# Altium PCB pcb.PcbDoc (part 9 of 9)
Units mil, origin at the board's own origin, x right, y up, seen from the top; angles counter-clockwise.
Board outline 3937.01 x 3937.01 mil, 4 copper layers (Top Layer, Ground plane, Power plane, Bottom Layer), stack 51.4 mil thick; 310 components, 276 nets, 1704 pads, 977 vias.
Unrouted connection lines stored in the file: 44.
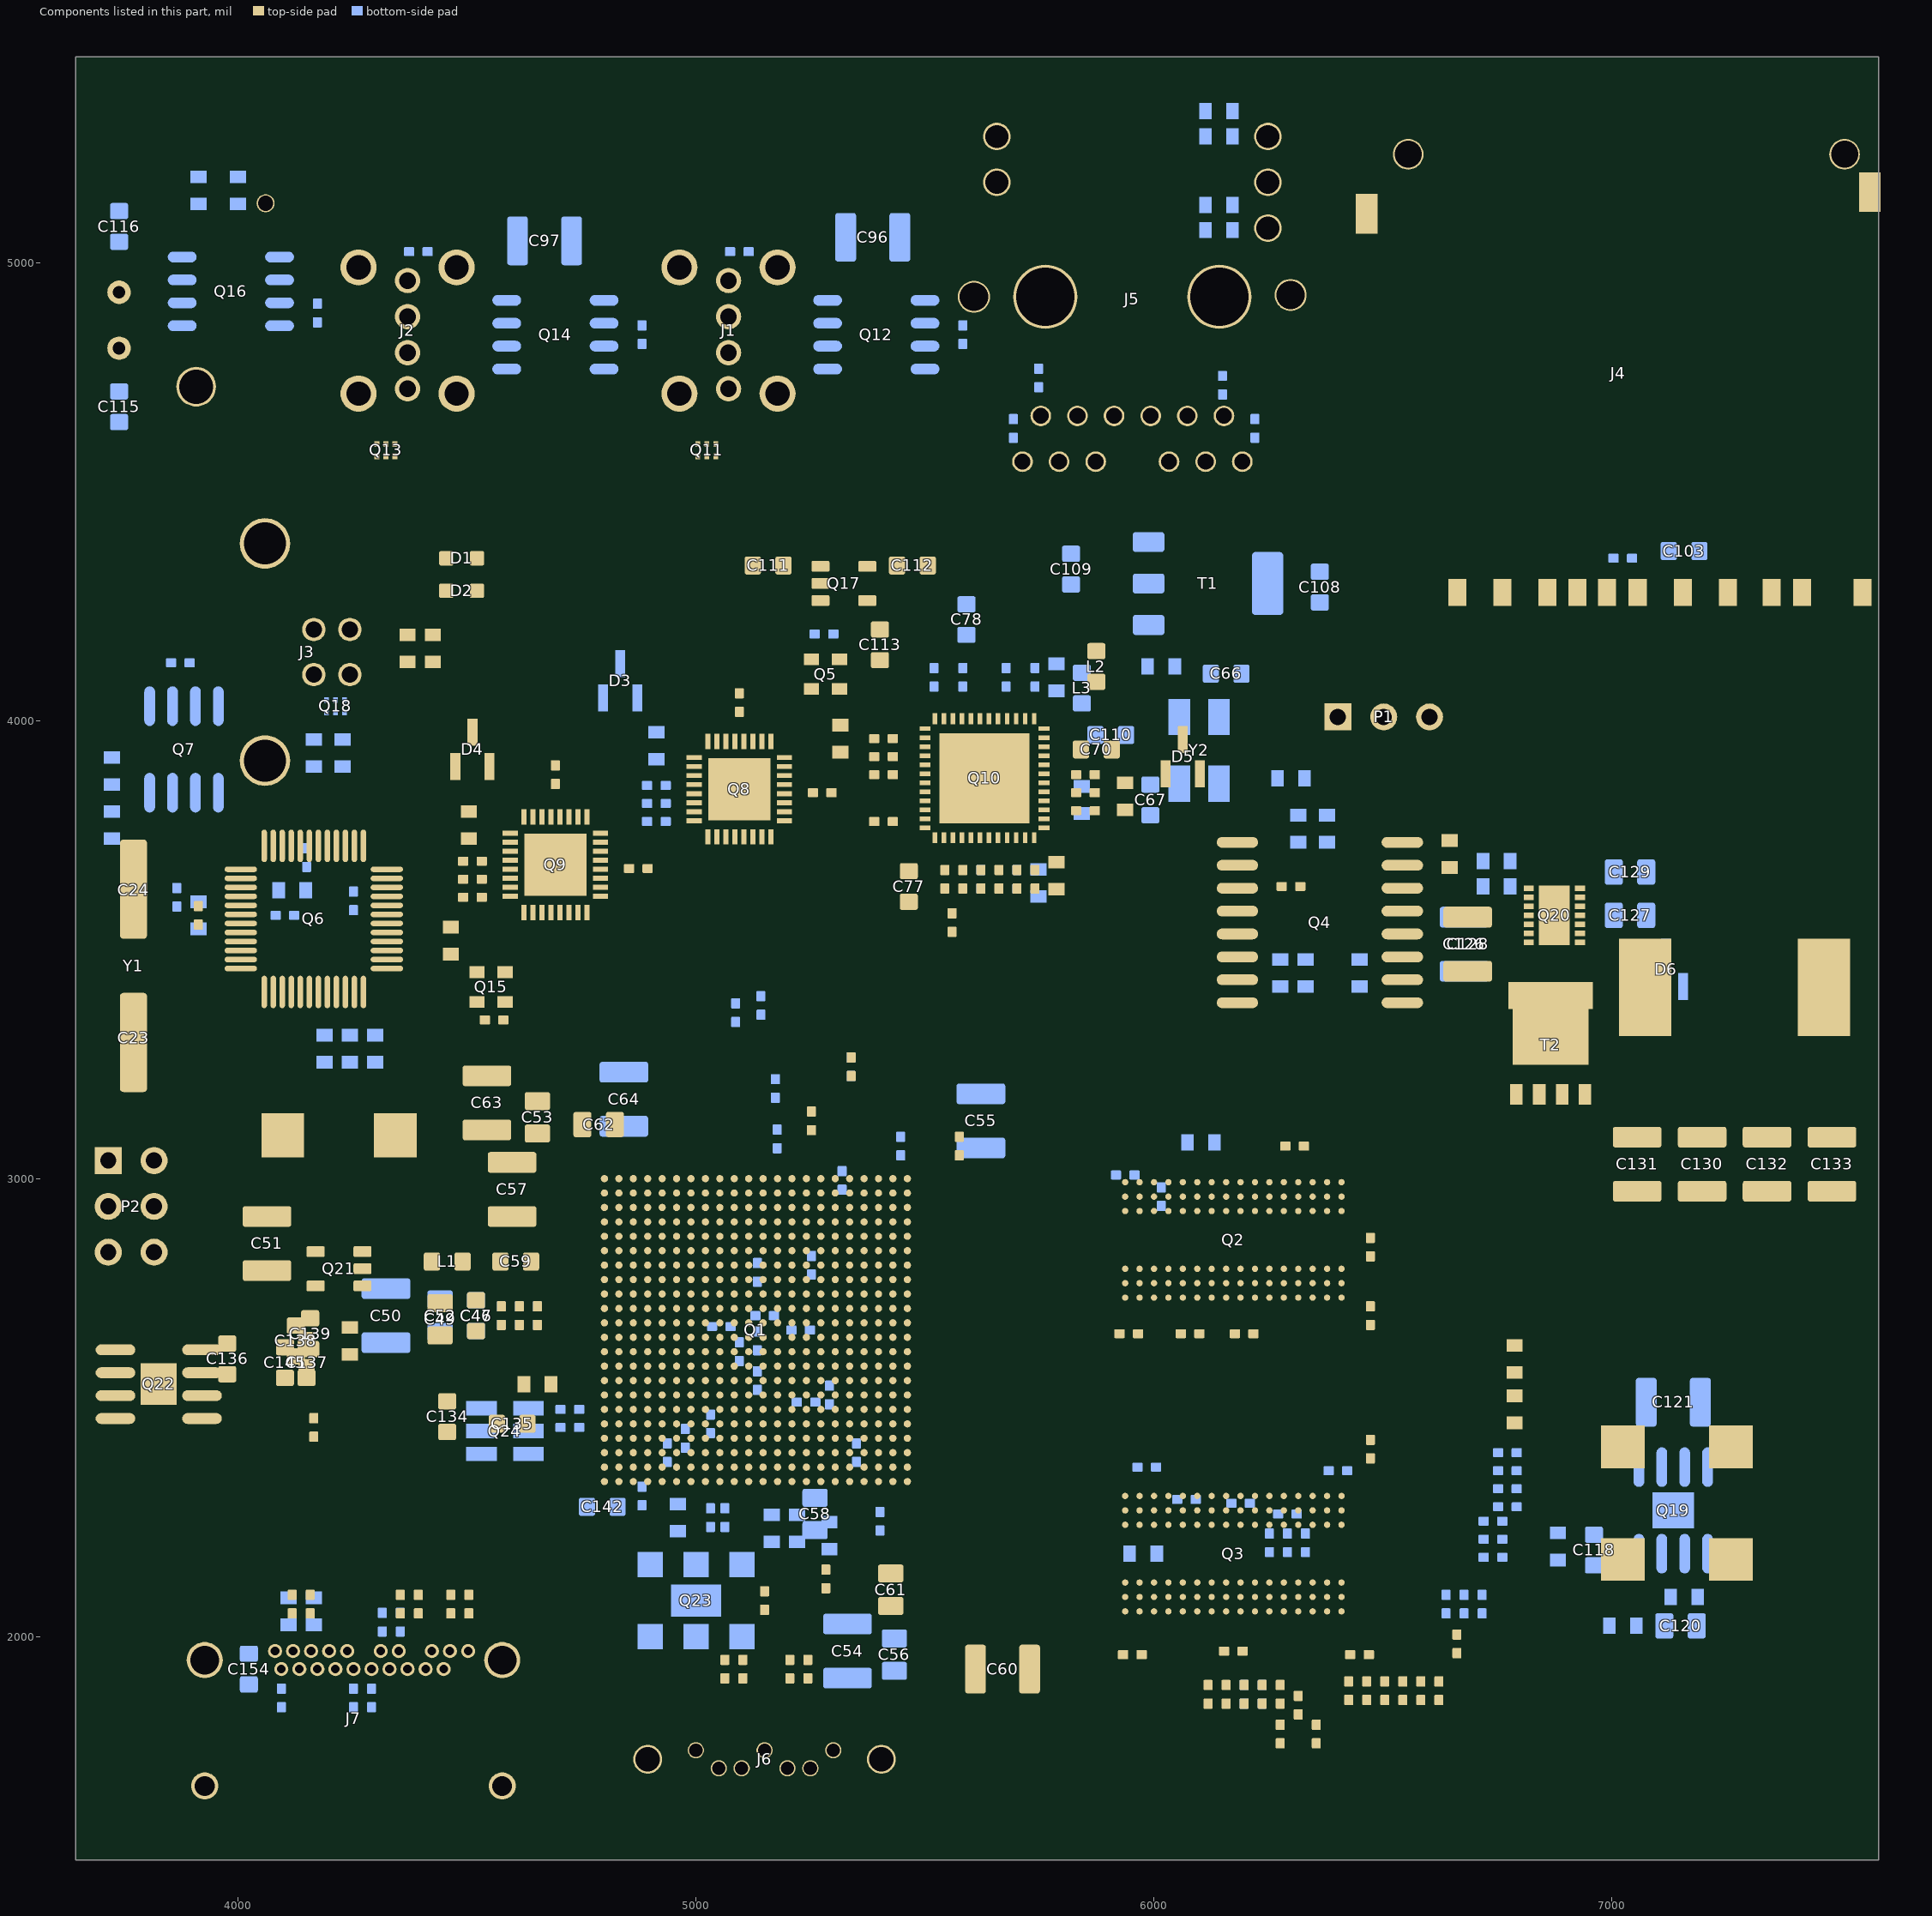
[diagram p10: the components of this part, seen from the top]

## Polygon pours and split planes (outlines as drawn)
1V5 on Power plane "Top Layer-No Net" (solid, remove dead copper, shelved, pour order 4): 5281.38,2859.33 5281.44,2858.27 5281.44,2644.54 5288.19,2637.79 5288.19,2365.35 5440.94,2212.6 5464.57,2188.98 5464.57,1944.88 5921.26,1944.88 6141.73,1724.41 6669.29,1724.41 6669.29,1874.02 6897.64,2102.36 6858.27,2141.73 6858.27,2929.13 6519.69,3267.72 5456.69,3267.72 5456.69,3034.65
NetC127_1 on Top Layer "Top Layer-No Net" (solid, remove dead copper, pour order 3): 6945.04,3563.9 6945.04,3499.37 6787.56,3499.37 6787.56,3233.19 7189.13,3233.19 7189.13,3563.9

## Text inside footprints (layer, text, board x,y; h text height)
P2: Top Overlay "1" at 3696.54,3119.37 h50 r270; Top Overlay "2" at 3796.54,3139.37 h50 r270; Top Overlay "5" at 3696.54,2779.37 h50 r270; Top Overlay "6" at 3796.54,2779.37 h50 r270